# Altium PCB PCB_RTM_SATA.PcbDoc
Units mil, origin at the board's own origin, x right, y up, seen from the top; angles counter-clockwise.
Board outline 2168.33 x 5849.53 mil, 4 copper layers (Top Layer, MidPlane_1, MidPlane_2, Bottom Layer), stack 61.899 mil thick; 27 components, 80 nets, 348 pads, 92 vias.
Unrouted connection lines stored in the file: 3.
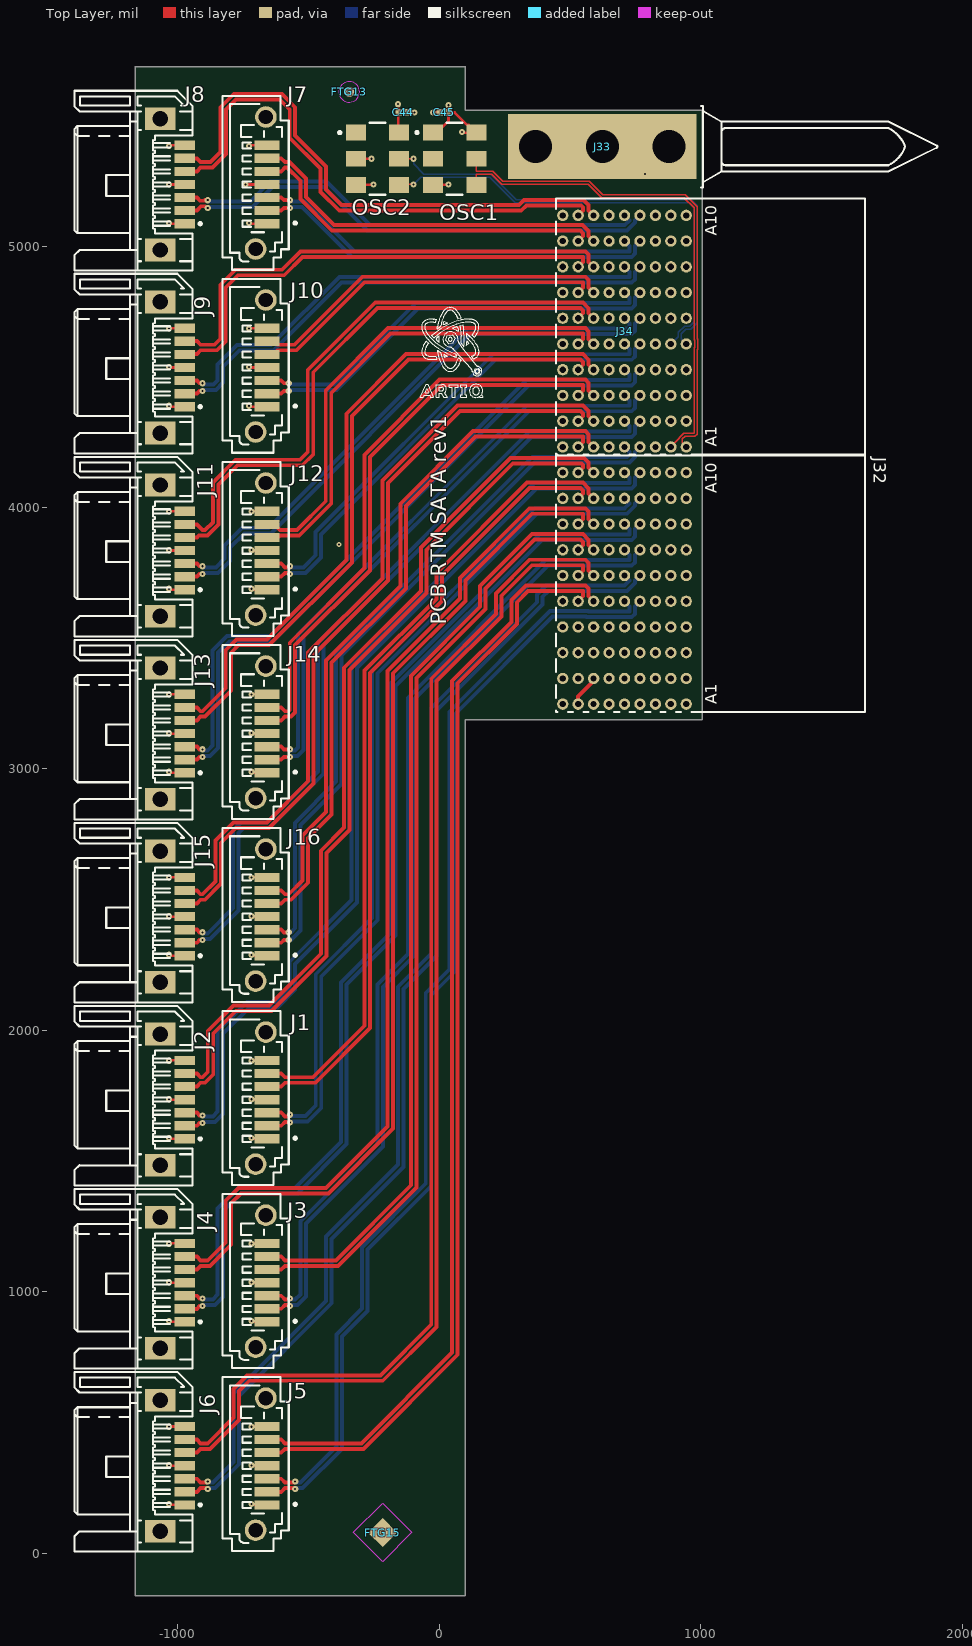
[diagram p0: Top Layer view]
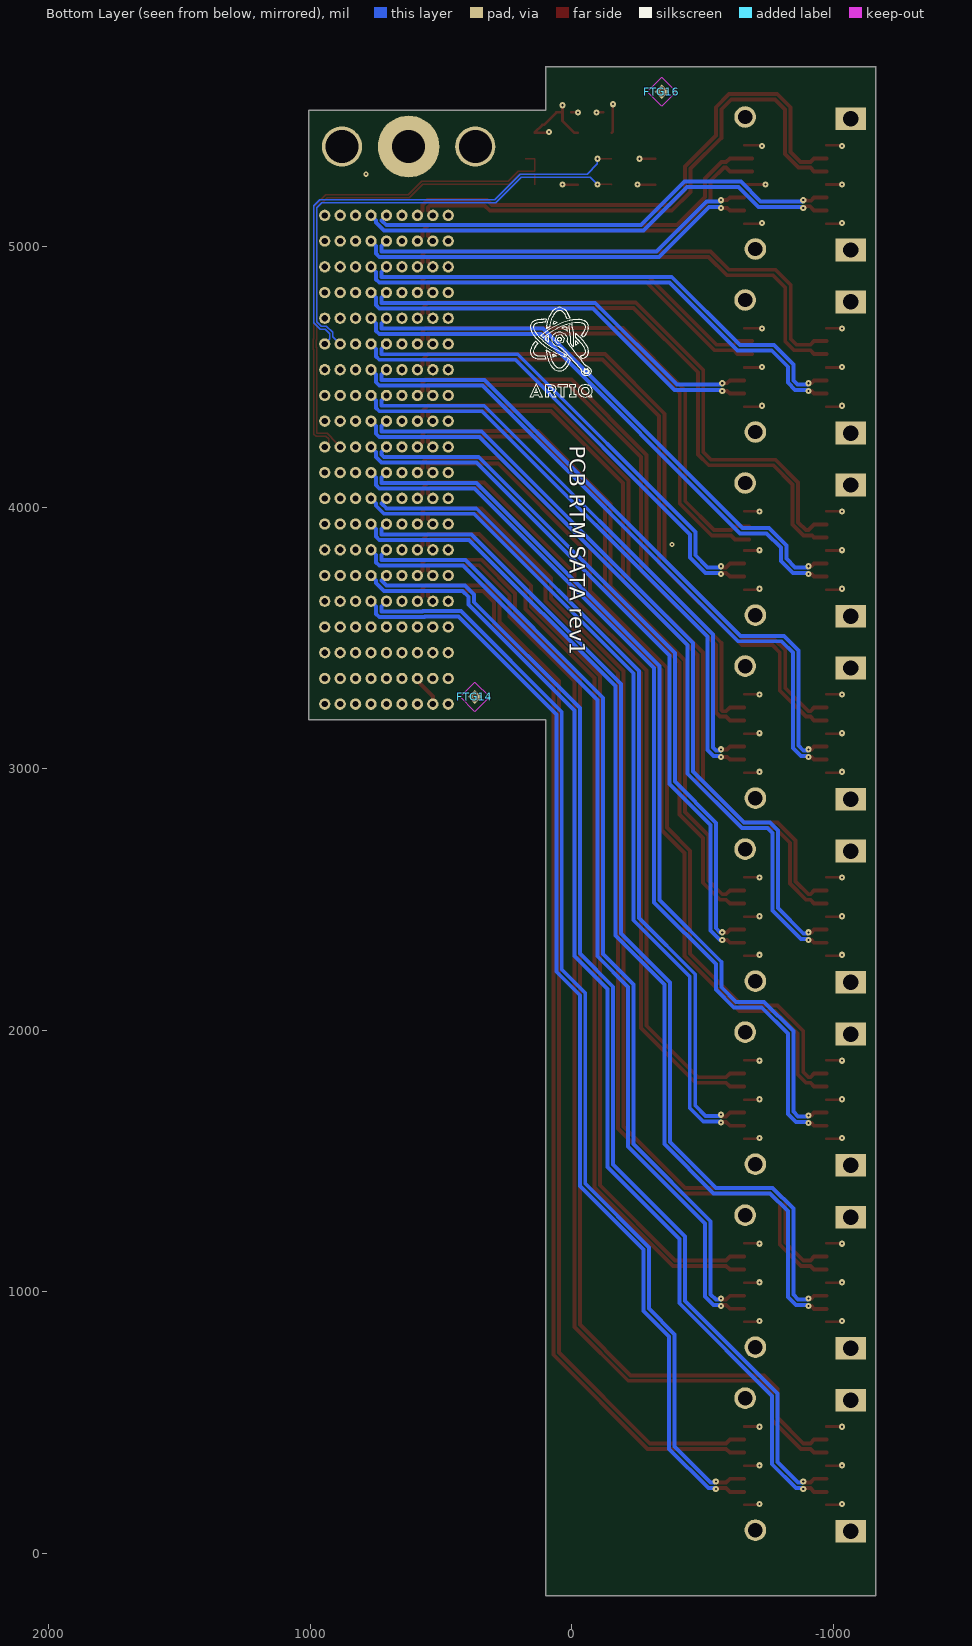
[diagram p1: Bottom Layer view, seen from below]
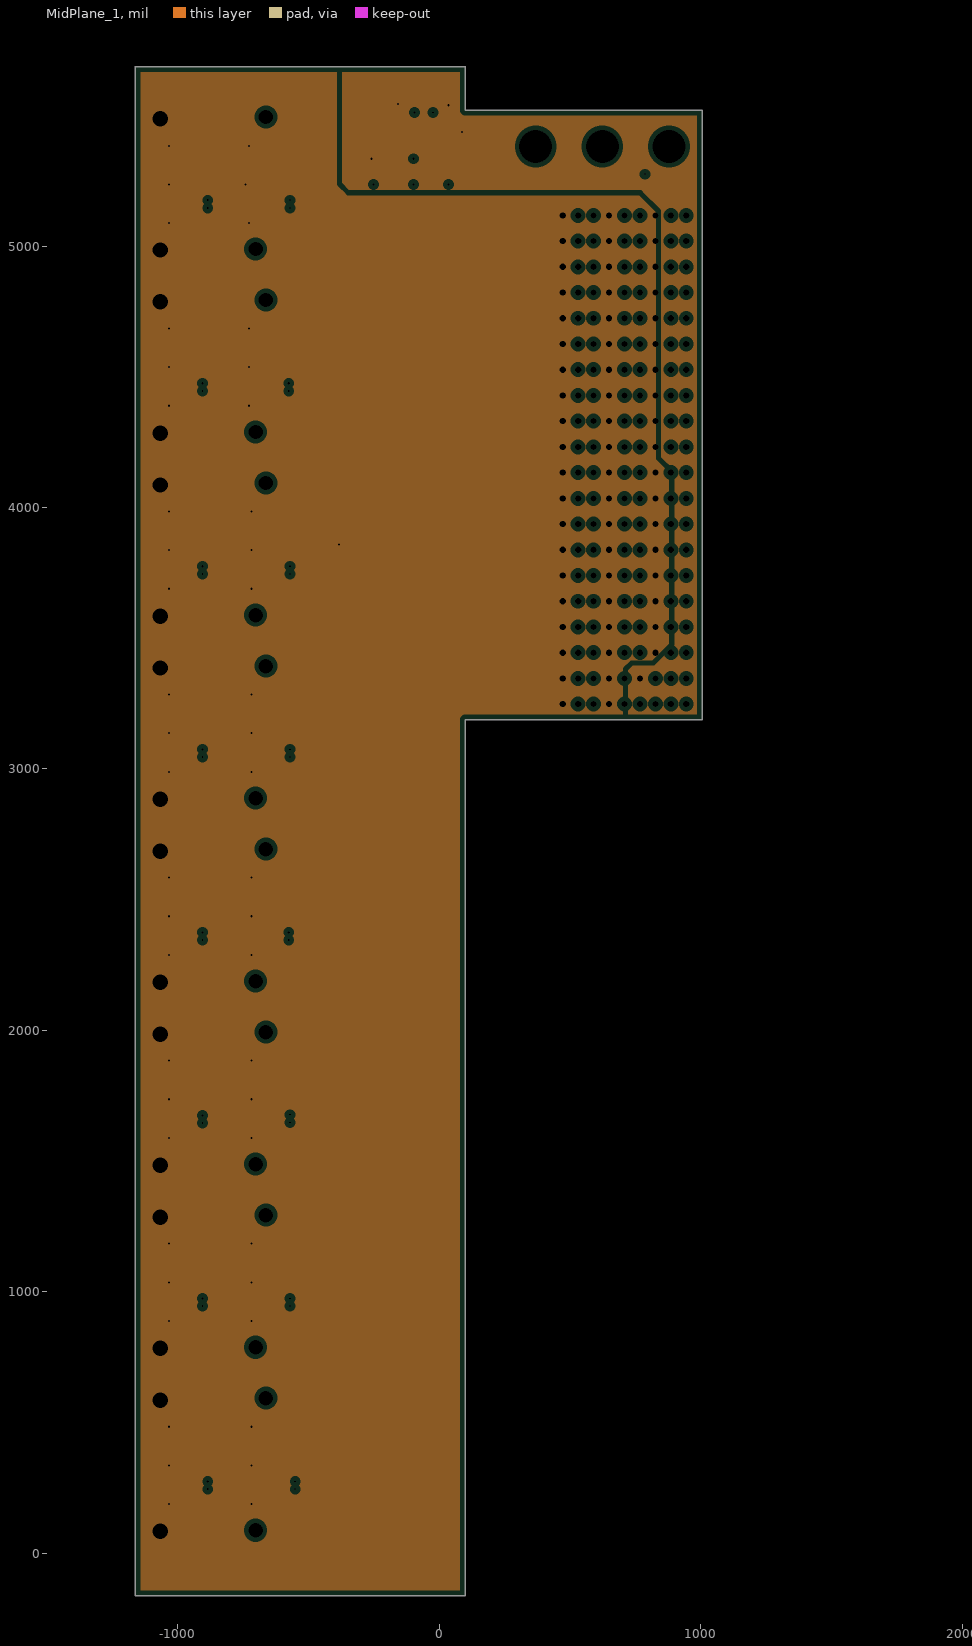
[diagram p2: MidPlane_1, clearances drawn from the general rule]
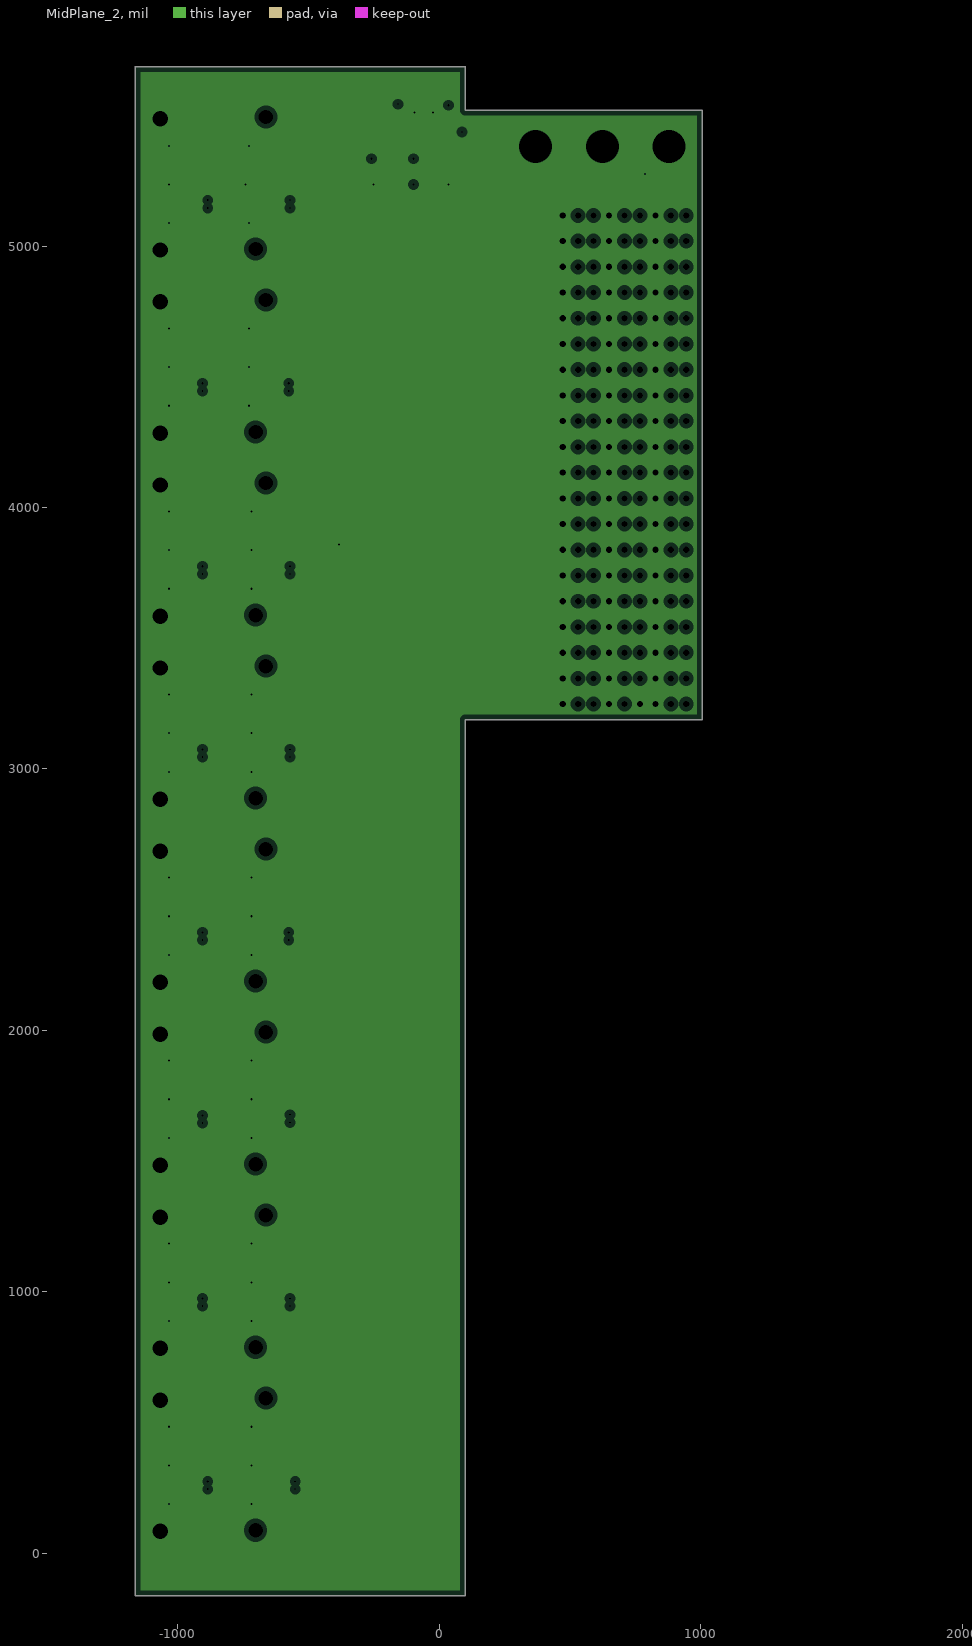
[diagram p3: MidPlane_2, clearances drawn from the general rule]
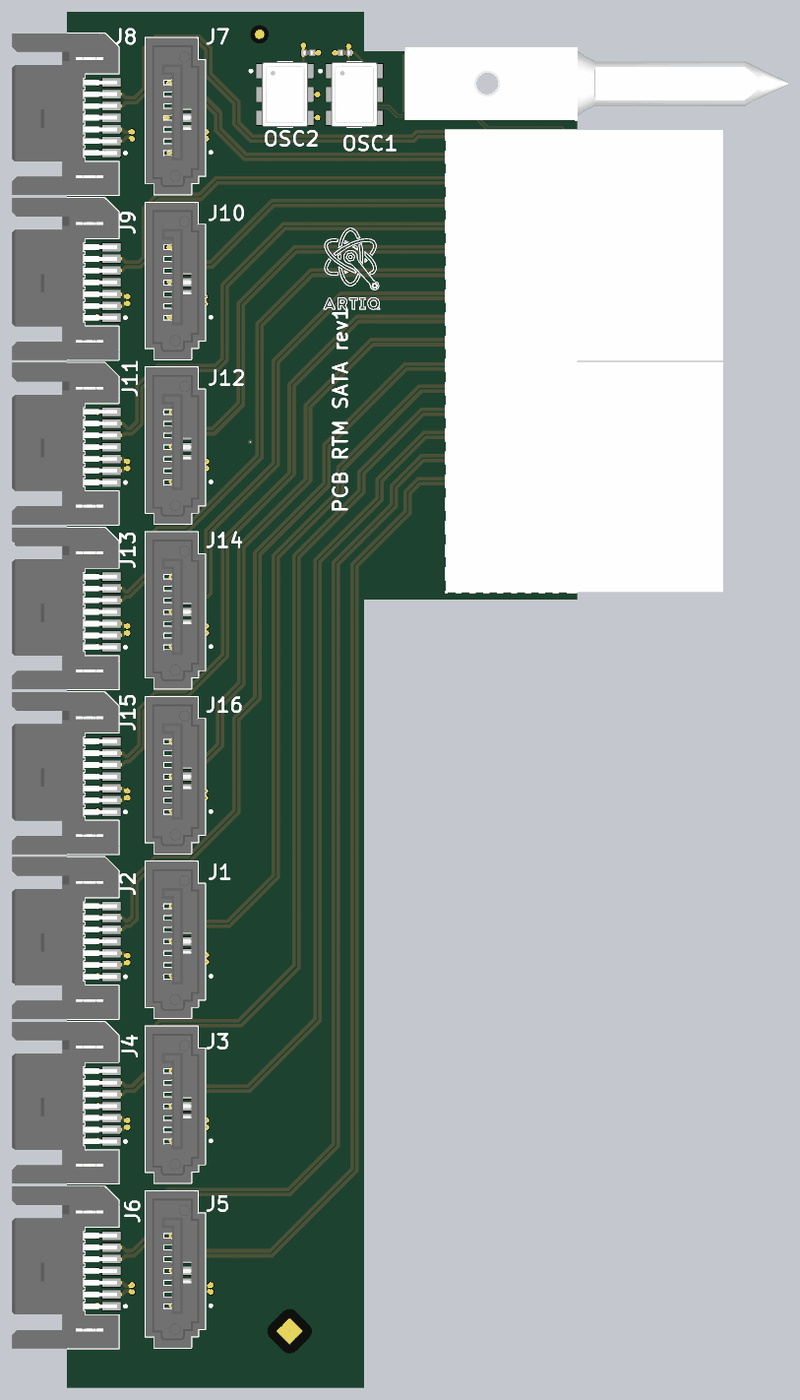
[diagram p4: 3D render of the assembled board from above, using the file's embedded part models]

## Layer stack, top to bottom
Top Solder: solder mask 0.4, Solder Resist, Dk 3.5
Top Layer: signal copper 1.4
Dielectric1: prepreg 14.1732, FR-4, Dk 4.8
MidPlane_1: plane copper 1.4, net GND
Dielectric3: core 27.9528, FR-4, Dk 4.8
MidPlane_2: plane copper 1.4, net GND
Dielectric2: prepreg 14.1732, FR-4, Dk 4.8
Bottom Layer: signal copper 1.4
Bottom Solder: solder mask 0.4, Solder Resist, Dk 3.5

## Board outline
-1161.42,-162.48 98.38,-162.48 ccw(c98.38,-160.97) 99.9,-160.97 99.9,3187.92 1003.88,3187.92 ccw(c1003.88,3189.43) 1005.4,3189.43 1005.4,5518.13 ccw(c1003.88,5518.13) 1003.88,5519.65 ccw(c1003.88,5518.13) 1003.85,5519.65 1003.88,5519.65 99.9,5519.65 99.9,5685.53 cw(c98.38,5685.53) 99.9,5685.53 ccw(c98.38,5685.53) 98.38,5687.05 ccw(c98.38,5685.53) 98.35,5687.05 -1161.42,5687.05 ccw(c-1161.42,5685.53) -1162.93,5685.53 -1162.93,-160.97 ccw(c-1161.42,-160.97)

## Design rules (kind name [scope] priority, off if disabled: settings)
Clearance Clearance_KO [OnLayer('Keep-Out Layer')] p1: gap=10
Clearance Clearance_Poly_DS [(InDifferentialPairClass('All Differential Pairs')) vs InPolygon] p2: gap=40
Clearance Clearance_Poly [InPolygon] p3: gap=11.81
Clearance Clearance_DS&CLK [(InNet('SFP_CLK*') OR InNet('FPGA_CLK*'))] p4: gap=6
Clearance Clearance_DS&RTM [WithinRoom('U_RTM_Connectors')] p5: gap=6
Clearance Clearance_DS [All] p6: gap=8
Clearance [All] p7: gap=6 except(15: Arc-Poly Track-Poly SMDPad-Poly THPad-Poly Via-Poly Fill-Poly Poly-Poly)
DiffPairsRouting [All] p1 off: maxlimit=6 minlimit=6 mostfreqgap=6 toplayer_minwidth=15 toplayer_maxwidth=15 toplayer_prefwidth=15 bottomlayer_minwidth=15 bottomlayer_maxwidth=15 bottomlayer_prefwidth=15 maxuncoupledlength=500
HoleSize [All] p1: absolutevalues=TRUE maxlimit=472.44 minlimit=1 maxpercent=80.000 minpercent=20.000
MinimumSolderMaskSliver [All] p1: minsoldermaskwidth=0
PlaneClearance [All] p1: clearance=16.73
PlaneConnect PlaneConnect_Via [IsVia] p1: planeconnectstyle=Direct reliefexpansion=20 reliefentries=4 reliefconductorwidth=10 reliefairgap=10
PlaneConnect [All] p2: planeconnectstyle=Relief reliefexpansion=10 reliefentries=4 reliefconductorwidth=10 reliefairgap=10
PolygonConnect PolygonConnect_Via [IsVia] p1: connectstyle=Direct reliefconductorwidth=10 reliefentries=4 polygonreliefangle="90 Angle" airgapwidth=10
PolygonConnect [All] p2: connectstyle=Relief reliefconductorwidth=10 reliefentries=4 polygonreliefangle="90 Angle" airgapwidth=10
RoomDefinition PCB_RTM_SATA [InComponentClass('PCB_RTM_SATA')] p1: confinementstyle=ConfineIn formatcopy=TRUE lockcomponents=FALSE outline -6375.21,3085.88 -4059.86,3085.88 -4059.86,3726.04 -6375.21,3726.04
RoutingVias [All] p1: holewidth=7.87 width=23.62 viastyle="Through Hole" minholewidth=7.87 minwidth=23.62 maxholewidth=23.62 maxwidth=47.24
SilkToSilkClearance [All] p1: silktosilkclearance=6
SilkToSolderMaskClearance SilkscreenOverComponentPads [IsPad] p1: minsilkscreentomaskgap=0 clearancetoexposedcopper=TRUE
SolderMaskExpansion [All] p1: expansion=4
Width Width_DS [(InDifferentialPairClass('All Differential Pairs'))] p1: maxlimit=12 minlimit=6 preferedwidth=12
Width [All] p2: maxlimit=23.54 minlimit=6 preferedwidth=23.54 minimp=50.000000 maximp=50.000000 favimp=50.000000
23 further rules are at their usual default settings.

## Classes and differential pairs
differential pair GTP10TX: +GTP10TX_P -GTP10TX_N
differential pair GTP9TX: +GTP9TX_P -GTP9TX_N
differential pair GTP8TX: +GTP8TX_P -GTP8TX_N
differential pair GTP7TX: +GTP7TX_P -GTP7TX_N
differential pair GTP6TX: +GTP6TX_P -GTP6TX_N
differential pair GTP5TX: +GTP5TX_P -GTP5TX_N
differential pair GTP4TX: +GTP4TX_P -GTP4TX_N
differential pair GTP3TX: +GTP3TX_P -GTP3TX_N
differential pair GTP2TX: +GTP2TX_P -GTP2TX_N
differential pair GTP1TX: +GTP1TX_P -GTP1TX_N
differential pair GTP16TX: +GTP16TX_P -GTP16TX_N
differential pair GTP16RX: +GTP16RX_P -GTP16RX_N
differential pair GTP15TX: +GTP15TX_P -GTP15TX_N
differential pair GTP15RX: +GTP15RX_P -GTP15RX_N
differential pair GTP14TX: +GTP14TX_P -GTP14TX_N
differential pair GTP14RX: +GTP14RX_P -GTP14RX_N
differential pair GTP13TX: +GTP13TX_P -GTP13TX_N
differential pair GTP13RX: +GTP13RX_P -GTP13RX_N
differential pair GTP12TX: +GTP12TX_P -GTP12TX_N
differential pair GTP12RX: +GTP12RX_P -GTP12RX_N
differential pair GTP11TX: +GTP11TX_P -GTP11TX_N
differential pair GTP11RX: +GTP11RX_P -GTP11RX_N
differential pair GTP10RX: +GTP10RX_P -GTP10RX_N
differential pair GTP9RX: +GTP9RX_P -GTP9RX_N
differential pair GTP8RX: +GTP8RX_P -GTP8RX_N
differential pair GTP7RX: +GTP7RX_P -GTP7RX_N
differential pair GTP6RX: +GTP6RX_P -GTP6RX_N
differential pair GTP5RX: +GTP5RX_P -GTP5RX_N
differential pair GTP4RX: +GTP4RX_P -GTP4RX_N
differential pair GTP3RX: +GTP3RX_P -GTP3RX_N
differential pair GTP2RX: +GTP2RX_P -GTP2RX_N
differential pair GTP1RX: +GTP1RX_P -GTP1RX_N
differential pair CLK1: +CLK1_P -CLK1_N
differential pair CLK2: +CLK2_P -CLK2_N

## Components (designator, comment, footprint, x,y, rotation, side; value= is the part's Value field where it differs from the comment)
C44 "100nF" CAPC1005X55N -137.8,5511.81 r180 top
C45 "100nF" CAPC1005X55N 19.68,5511.81 r0 top
FTG13 "Use only in PCB" FIDUCIAL_TOP_C100-200 -344.49,5590.55 r90 top
FTG14 "Use only in PCB" FIDUCIAL_TOP_S100-200 370.08,3275.59 r90 bottom
FTG15 "Use only in PCB" FIDUCIAL_TOP_S200-400 -216.54,78.74 r0 top
FTG16 "Use only in PCB" FIDUCIAL_TOP_S100-200 -344.49,5590.55 r90 bottom
J1 "SATA" MOLEX_67800-5005 -659.45,1735.1 r90 top
J2 "SATA" 3M_5607-4200-SH -974.41,1735.1 r270 top
J3 "SATA" MOLEX_67800-5005 -659.45,1034.87 r90 top
J4 "SATA" 3M_5607-4200-SH -974.41,1034.87 r270 top
J5 "SATA" MOLEX_67800-5005 -659.45,334.65 r90 top
J6 "SATA" 3M_5607-4200-SH -974.41,334.65 r270 top
J7 "SATA" MOLEX_67800-5005 -659.45,5236.22 r90 top
J8 "SATA" 3M_5607-4200-SH -974.41,5236.22 r270 top
J9 "SATA" 3M_5607-4200-SH -974.41,4536 r270 top
J10 "SATA" MOLEX_67800-5005 -659.45,4536 r90 top
J11 "SATA" 3M_5607-4200-SH -974.41,3835.77 r270 top
J12 "SATA" MOLEX_67800-5005 -659.45,3835.77 r90 top
J13 "SATA" 3M_5607-4200-SH -974.41,3135.55 r270 top
J14 "SATA" MOLEX_67800-5005 -659.45,3135.55 r90 top
J15 "SATA" 3M_5607-4200-SH -974.41,2435.32 r270 top
J16 "SATA" MOLEX_67800-5005 -659.45,2435.32 r90 top
J32 "Family" TYCO_6469183-1 708.66,3690.95 r0 top locked
J33 "Family" TYCO_1469265-1 624,5381.35 r0 top
J34 "Family" TYCO_6469183-1 708.66,4675.2 r0 top locked
OSC1 "125MHz" OSC_SILICON-LAB_SI531 59.06,5334.65 r0 top
OSC2 "156.25MHz" OSC_SILICON-LAB_SI530 -236.22,5334.65 r0 top

## Footprints (in the part's own frame and the unit in brackets; to place one, negate y for a bottom-side part, rotate by r counter-clockwise, add the part's x,y. Pads: shape width x height; smd on the part's side, far side on the other; paste and mask are expansions set on the pad)
3M_5607-4200-SH [mm] "1.27mm (.050\") Pitch, Surface Mount, Right Angle, Serial ATA Plug (SATA)"
  rect 0.9x2 smd: 1(3.81,0) 2(2.54,0) 3(1.27,0) 4(0,0) 5(-1.27,0) 6(-2.54,0) 7(-3.81,0)
  rect 2.2x3 hole 1.5: 8(-6.37,-2.36) 8(6.37,-2.36)
  silkscreen extent -9.11,-10.71 8.36,1.64, body extent -9.11,-10.71 8.36,0.79, height 4
CAPC1005X55N [mm] "Chip Capacitor, Body 1.0x0.55mm, IPC Medium Density"
  rect 0.62x0.62 smd: 1(-0.45,0) 2(0.45,0)
  body extent -0.52,-0.27 0.53,0.28, height 0.55
FIDUCIAL_TOP_C100-200 [mm] "Round Fiducial Target, Top Layer, 1.0mm, Top Solder 2.0mm, Keepout =2.0mm"
  round 1 smd paste-0.51 mask+0.5: FTG2(0,0)
  Top Layer keep-out circle w0.1: c0,0 r1
FIDUCIAL_TOP_S100-200 [mm] "Square Fiducial Target, Top Layer, 1.0mm, Top Solder 2.0mm, Keepout =2.0mm"
  rect 1x1 smd rot 45 paste-0.51 mask+0.5: 1(0,0)
  Top Layer keep-out region: 1.414,0 0,-1.414 -1.414,0 0,1.414
FIDUCIAL_TOP_S200-400 [mm] "Square Fiducial Target, Top Layer, 2.0mm, Top Solder 4.0mm, Keepout =4.0mm"
  rect 2x2 smd rot 45 paste-0.9 mask+1: 1(0,0)
  Top Layer keep-out region: -2.839,0.011 -0.011,2.839 2.818,0.011 -0.011,-2.818
MOLEX_67800-5005 [mm] "1.27mm Pitch, 7 Contacts, Serial ATA High Speed Header, Straight with Locking Latch"
  rect 0.9x2.4 smd: 1(-3.81,0) 2(-2.54,0) 3(-1.27,0) 4(0,0) 5(1.27,0) 6(2.54,0) 7(3.81,0)
  round 2.1 hole 1.4: MECH1(-6.27,1.1) MECH2(6.56,0.1)
  silkscreen extent -8.28,-2.88 8.61,4.33, body extent -8.29,-2.13 8.62,4.32, height 8.4
OSC_SILICON-LAB_SI530 [mm] "Oscillator Si530 Series, 6 pins, 5x7mm"
  rect 1.95x1.55 smd: 1(-2.1,2.54) 2(-2.1,0) 3(-2.1,-2.54) 4(2.1,-2.54) 5(2.1,0) 6(2.1,2.54)
  silkscreen extent -3.8,-3.5 0.77,3.5, body extent -2.5,-3.5 2.5,3.5, height 1.8
OSC_SILICON-LAB_SI531 [mm] "Oscillator Si531 Series, 6 pins, 5x7mm"
  rect 1.95x1.55 smd: 1(-2.1,2.54) 2(-2.1,0) 3(-2.1,-2.54) 4(2.1,-2.54) 5(2.1,0) 6(2.1,2.54)
  silkscreen extent -3.8,-3.5 0.77,3.5, body extent -2.5,-3.5 2.5,3.5, height 1.8
TYCO_1469265-1 [mm] "Universal Right Angle Male Power Module Guide (keyed)"
  round 3.9 hole 3.2: 1(-6.48,0) 1(6.48,0)
  rect 18.3x6.3 smd paste-4.15 mask-4.15: 1(0,0)
  round 6 hole 3.2: 1(0,0)
  silkscreen extent 9.58,-3.96 32.55,3.94, body extent -8.92,-3.95 32.53,3.95, height 9.7
TYCO_6469183-1 [mm] "60 Positions, Pitch 2.5mm,  Advanced TCA, Z-PACK HM-Zd BackPlane Press Fit Header"
  round 1.1 hole 0.6: A1(6,-11.25) A2(6,-8.75) A3(6,-6.25) A4(6,-3.75) A5(6,-1.25) A6(6,1.25) A7(6,3.75) A8(6,6.25) A9(6,8.75) A10(6,11.25) B1(4.5,-11.25) B2(4.5,-8.75) B3(4.5,-6.25) B4(4.5,-3.75) B5(4.5,-1.25) B6(4.5,1.25) B7(4.5,3.75) B8(4.5,6.25) B9(4.5,8.75) B10(4.5,11.25) BG1(3,-11.25) BG2(3,-8.75) BG3(3,-6.25) BG4(3,-3.75) BG5(3,-1.25) BG6(3,1.25) BG7(3,3.75) BG8(3,6.25) BG9(3,8.75) BG10(3,11.25) C1(1.5,-11.25) C2(1.5,-8.75) C3(1.5,-6.25) C4(1.5,-3.75) C5(1.5,-1.25) C6(1.5,1.25) C7(1.5,3.75) C8(1.5,6.25) C9(1.5,8.75) C10(1.5,11.25) D1(0,-11.25) D2(0,-8.75) D3(0,-6.25) D4(0,-3.75) D5(0,-1.25) D6(0,1.25) D7(0,3.75) D8(0,6.25) D9(0,8.75) D10(0,11.25) DG1(-1.5,-11.25) DG2(-1.5,-8.75) DG3(-1.5,-6.25) DG4(-1.5,-3.75) DG5(-1.5,-1.25) DG6(-1.5,1.25) DG7(-1.5,3.75) DG8(-1.5,6.25) DG9(-1.5,8.75) DG10(-1.5,11.25) E1(-3,-11.25) E2(-3,-8.75) E3(-3,-6.25) E4(-3,-3.75) E5(-3,-1.25) E6(-3,1.25) E7(-3,3.75) E8(-3,6.25) E9(-3,8.75) E10(-3,11.25) F1(-4.5,-11.25) F2(-4.5,-8.75) F3(-4.5,-6.25) F4(-4.5,-3.75) F5(-4.5,-1.25) F6(-4.5,1.25) F7(-4.5,3.75) F8(-4.5,6.25) F9(-4.5,8.75) F10(-4.5,11.25) FG1(-6,-11.25) FG2(-6,-8.75) FG3(-6,-6.25) FG4(-6,-3.75) FG5(-6,-1.25) FG6(-6,1.25) FG7(-6,3.75) FG8(-6,6.25) FG9(-6,8.75) FG10(-6,11.25)
  silkscreen extent -6.65,-12 23.35,12.9, body extent -6.65,-12 23.35,12.9, height 13.31

## Part data
C44 C45: library part CC0402_100NF_16V_10%_X7R, "Non-polarised capacitor"
FTG13: library part FIDUCIAL_TARGET_C100-200, "Fiducial Target"
FTG14 FTG16: library part FIDUCIAL_TARGET_S100-200, "Fiducial Target"
FTG15: library part FIDUCIAL_TARGET_S200-400, "Fiducial Target"
J1 J3 J5 J7 J10 J12 J14 J16: library part MOLEX_67800-5005, "7 Pin SATA Receptacle"
J2 J4 J6 J8 J9 J11 J13 J15: library part 3M_5607-4200-SH, "7 Pin + 1 Shield SATA Receptacle"
J32 J34: library part TYCO_6469183-1, "Connector 60 ATCA Male 30 Pairs (60 Signals) + 3x10 Ground"
J33: library part TYCO_1469265-1, "Single Pin Male"
OSC1: library part OSC_125MHZ_SILICON-LAB_531BC125M000DG, "10-1400MHz, Crystal Oscillator (XO), Si531 Series"
OSC2: library part OSC_156.25MHZ_SILICON-LAB_530BC156M250DG, "10-1400MHz, Crystal Oscillator (XO), Si530 Series"

## Via types
v1: diameter 23.62, hole 7.87, Top Layer to Bottom Layer, 90 vias
v2: diameter 19.68, hole 7.87, Top Layer to Bottom Layer, tented both sides, 2 vias

## Nets (pads, with @x,y where several pads share a name; then routed paths per layer and width w, separated by ;. In a path a pad name is that pad's centre, name@x,y a point inside that pad or via, vN(x,y) a via of type N, cw(c..) or ccw(c..) an arc to the next point about the centre after c; other vN are vias at no path point)
CLK1_N: J34.A1 OSC1.5 | length 1956
  Top Layer w5: OSC1.5@177.17,5334.65 OSC1.5 141.73,5287.4 204.72,5287.4 243.29,5248.84 573.8,5248.84 625.79,5196.85 940.94,5196.85 986.04,5151.76 986.04,4645.86 988.04,4643.86 988.04,4606.3 986.04,4604.3 986.04,4281.5 978.15,4273.62 940.41,4273.62 929.75,4262.97 929.75,4247.41 J34.A1
CLK1_P: J34.B1 OSC1.4 | length 1903
  Top Layer w5: OSC1.4 141.73,5275.59 200.98,5275.59 238.73,5237.84 569.25,5237.84 621.24,5185.85 936.2,5185.85 975.04,5147.01 975.04,4641.3 977.04,4639.3 977.04,4612.67 975.04,4610.67 975.04,4286.06 973.6,4284.62 935.85,4284.62 918.75,4267.52 918.75,4265.21 J34.B1
CLK2_N: J34.A5 OSC2.5 | length 1799.3
  Top Layer w5: OSC2.5 v1(-98.43,5334.65)
  Bottom Layer w5: v1(-98.43,5334.65) -98.43,5314.96 -59.06,5275.59 196.85,5275.59 295.28,5177.17 964.57,5177.17 986.04,5155.7 986.04,4707.36 961.93,4683.26 943.1,4683.26 925.2,4665.35 925.2,4645.67 J34.A5
CLK2_P: J34.B5 OSC2.4 | length 1758.7
  Top Layer w5: OSC2.4 -151.97,5236.22 v1(-98.43,5236.22)
  Bottom Layer w5: v1(-98.43,5236.22) -70.06,5264.59 192.29,5264.59 290.72,5166.17 955.88,5166.17 975.04,5147.01 975.04,4711.92 965.15,4702.03 957.37,4694.26 938.54,4694.26 914.2,4669.91 914.2,4654.35 J34.B5
GND: C44.1 C45.1 J1.1 J1.4 J1.7 J2.1 J2.4 J2.7 J2.8 J3.1 J3.4 J3.7 J4.1 J4.4 J4.7 J4.8 J5.1 J5.4 J5.7 J6.1 J6.4 J6.7 J6.8 J7.1 J7.4 J7.7 J8.1 J8.4 J8.7 J8.8 J9.1 J9.4 J9.7 J9.8 J10.1 J10.4 J10.7 J11.1 J11.4 J11.7 J11.8 J12.1 J12.4 J12.7 J13.1 J13.4 J13.7 J13.8 J14.1 J14.4 J14.7 J15.1 J15.4 J15.7 J15.8 J16.1 J16.4 J16.7 J32.BG1 J32.BG2 J32.BG3 J32.BG4 J32.BG5 J32.BG6 J32.BG7 J32.BG8 J32.BG9 J32.BG10 J32.C1 J32.DG1 J32.DG2 J32.DG3 J32.DG4 J32.DG5 J32.DG6 J32.DG7 J32.DG8 J32.DG9 J32.DG10 J32.FG1 J32.FG2 J32.FG3 J32.FG4 J32.FG5 J32.FG6 J32.FG7 J32.FG8 J32.FG9 J32.FG10 J33.1 J34.BG1 J34.BG2 J34.BG3 J34.BG4 J34.BG5 J34.BG6 J34.BG7 J34.BG8 J34.BG9 J34.BG10 J34.DG1 J34.DG2 J34.DG3 J34.DG4 J34.DG5 J34.DG6 J34.DG7 J34.DG8 J34.DG9 J34.DG10 J34.FG1 J34.FG2 J34.FG3 J34.FG4 J34.FG5 J34.FG6 J34.FG7 J34.FG8 J34.FG9 J34.FG10 OSC1.3 OSC2.3 | length 3124.8
  Top Layer w10: v1(-1033.46,188.41) -1029.7,184.65 J6.1 ; v1(-1033.46,336.05) -1032.06,334.65 J6.4 ; v1(-1033.46,483.69) -1032.51,484.65 J6.7 ; v1(-1033.46,888.64) -1029.7,884.87 J4.1 ; v1(-1033.46,1036.28) -1032.06,1034.87 J4.4 ; v1(-1033.46,1183.91) -1032.51,1184.87 J4.7 ; v1(-1033.46,1588.86) -1029.7,1585.1 J2.1 ; v1(-1033.46,1736.5) -1032.06,1735.1 J2.4 ; v1(-1033.46,1884.14) -1032.51,1885.1 J2.7 ; v1(-1033.46,2289.09) -1029.7,2285.32 J15.1 ; v1(-1033.46,2436.73) -1032.06,2435.32 J15.4 ; v1(-1033.46,2584.36) -1032.51,2585.32 J15.7 ; v1(-1033.46,2989.31) -1029.7,2985.55 J13.1 ; v1(-1033.46,3136.95) -1032.06,3135.55 J13.4 ; v1(-1033.46,3284.59) -1032.51,3285.55 J13.7 ; v1(-1033.46,3689.54) -1029.7,3685.77 J11.1 ; v1(-1033.46,3837.18) -1032.06,3835.77 J11.4 ; v1(-1033.46,3984.81) -1032.51,3985.77 J11.7 ; v1(-1033.46,4389.76) -1029.7,4385.99 J9.1 ; v1(-1033.46,4537.4) -1032.06,4536 J9.4 ; v1(-1033.46,4685.04) -1032.51,4686 J9.7 ; v1(-1033.46,5088.58) -1031.1,5086.22 J8.1 ; v1(-1033.46,5236.22) J8.4 ; v1(-1033.46,5383.86) -1031.1,5386.22 J8.7 ; v1(-741.54,5236.22) J7.4 ; v1(-728.35,4389.76) -724.58,4386 J10.1 ; v1(-728.35,4537.4) -726.94,4536 J10.4 ; v1(-728.35,4685.04) -727.39,4686 J10.7 ; v1(-728.35,5088.58) -725.98,5086.22 J7.1 ; v1(-728.35,5383.86) -725.98,5386.22 J7.7 ; v1(-718.5,188.41) -714.74,184.65 J5.1 ; v1(-718.5,336.05) -717.1,334.65 J5.4 ; v1(-718.5,483.69) -717.55,484.65 J5.7 ; v1(-718.5,888.64) -714.74,884.87 J3.1 ; v1(-718.5,1036.28) -717.1,1034.87 J3.4 ; v1(-718.5,1183.91) -717.55,1184.87 J3.7 ; v1(-718.5,1588.86) -714.73,1585.1 J1.1 ; v1(-718.5,1736.5) -717.1,1735.1 J1.4 ; v1(-718.5,1884.14) -717.55,1885.1 J1.7 ; v1(-718.5,2289.09) -714.73,2285.32 J16.1 ; v1(-718.5,2436.73) -717.1,2435.32 J16.4 ; v1(-718.5,2584.36) -717.55,2585.32 J16.7 ; v1(-718.5,2989.31) -714.73,2985.55 J14.1 ; v1(-718.5,3136.95) -717.1,3135.55 J14.4 ; v1(-718.5,3284.59) -717.55,3285.55 J14.7 ; v1(-718.5,3689.54) -714.73,3685.77 J12.1 ; v1(-718.5,3837.18) -717.1,3835.77 J12.4 ; v1(-718.5,3984.81) -717.55,3985.77 J12.7 ; OSC2.3 -253.54,5234.65 v1(-251.97,5236.22) ; C44.1 v1(-94.49,5511.81) ; OSC1.3 33.86,5234.65 v1(35.43,5236.22) ; v1(-23.62,5511.81) C45.1
  other v2: -383.86,3858.27 787.4,5275.59
GTP1RX_N: J8.3 J34.D10 | length 1816.8
  Top Layer w15: J8.3 -927.54,5186.22 -915.19,5173.88 v1@-895.67,5173.88 ; v1@-895.67,5176.03 v1(-885.83,5176.03)
  Bottom Layer w15: v1(-885.83,5176.03) -881.52,5171.72 -722.59,5171.72 -646.93,5247.38 -432.13,5247.38 -265.75,5081 516.06,5081 ; 727.69,5099.08 709.61,5081 605.98,5081 605.94,5080.96 575.16,5080.96 575.12,5081 546.93,5081 546.89,5080.96 516.11,5080.96 ; 516.06,5081 516.11,5080.96
GTP1RX_P: J8.2 J34.C10 | length 1870.5
  Top Layer w15: J8.2 -927.54,5136.22 -910.88,5152.88 v1@-895.67,5152.88
  Bottom Layer w15: v1(-885.83,5146.41) -881.52,5150.72 -713.89,5150.72 -638.24,5226.38 -440.82,5226.38 -274.45,5060 507.36,5060 507.41,5059.96 555.58,5059.96 555.63,5060 566.42,5060 566.46,5059.96 614.64,5059.96 614.68,5060 718.3,5060 748.69,5090.38 748.69,5099.08 J34.C10
GTP1TX_N: J8.5 J34.F10 | length 2079.7
  Top Layer w15: J8.5 -927.54,5286.22 -913.04,5300.72 -867.29,5300.72 -815.61,5352.39 -815.61,5522.97 -777.56,5561.02 -610.24,5561.02 -572.18,5522.97 -572.18,5414.7 -454.07,5296.59 -454.07,5207.84 -382.71,5136.48 313.65,5136.48 333.33,5156.17 522.8,5156.17 543.14,5156.17 550.52,5148.78 550.52,5137.14 J34.F10
GTP1TX_P: J8.6 J34.E10 | length 2114.5
  Top Layer w15: J8.6 -927.54,5336.22 -913.04,5321.72 -875.98,5321.72 -836.61,5361.09 -836.61,5531.67 -786.26,5582.02 -601.54,5582.02 -551.18,5531.67 -551.18,5423.4 -433.07,5305.29 -433.07,5216.54 -374.02,5157.48 304.95,5157.48 324.63,5177.17 551.84,5177.17 571.52,5157.48 571.52,5137.14 J34.E10
GTP2RX_N: J7.3 J34.D9 | length 1519.7
  Top Layer w15: J7.3 -604.7,5186.22 -594.52,5176.03 v1(-570.87,5176.03)
  Bottom Layer w15: v1(-570.87,5176.03) -566.56,5171.72 -516.21,5171.72 -324.8,4980.32 727.69,4980.32 727.69,5000.66 J34.D9
GTP2RX_P: J7.2 J34.C9 | length 1554.5
  Top Layer w15: J7.2 -604.7,5136.22 -594.52,5146.41 v1(-570.87,5146.41)
  Bottom Layer w15: v1(-570.87,5146.41) -566.56,5150.72 -524.91,5150.72 -333.5,4959.32 736.39,4959.32 748.69,4971.62 748.69,5000.66 J34.C9
GTP2TX_N: J7.5 J34.F9 | length 1428.3
  Top Layer w15: J7.5@-688.98,5286.22 J7.5 -604.7,5286.22 -590.2,5300.72 -581.85,5300.72 -531.5,5250.36 -531.5,5180.08 -411.42,5060 507.36,5060 507.41,5059.96 539.78,5059.96 550.52,5049.21 550.52,5038.71 J34.F9
GTP2TX_P: J7.6 J34.E9 | length 1463.3
  Top Layer w15: J7.6@-688.98,5336.22 J7.6 -604.7,5336.22 -604.7,5335.87 -590.55,5321.72 -573.15,5321.72 -510.5,5259.06 -510.5,5188.78 -402.72,5081 516.06,5081 ; J34.E9 571.52,5038.71 571.52,5057.91 548.43,5081 546.93,5081 546.89,5080.96 516.11,5080.96 ; 516.06,5081 516.11,5080.96
GTP3RX_N: J9.3 J34.D8 | length 1960.8
  Top Layer w15: J9.3 -927.54,4486 -917.35,4475.81 v1(-905.51,4475.81)
  Bottom Layer w15: v1(-905.51,4475.81) -901.2,4471.5 -863.15,4471.5 -847.77,4486.87 -847.77,4547.46 -773.93,4621.3 -643.09,4621.3 -382.5,4881.89 727.69,4881.89 727.69,4902.23 J34.D8
GTP3RX_P: J9.2 J34.C8 | length 1995.6
  Top Layer w15: J9.2 -927.54,4435.99 -917.35,4446.18 v1(-905.51,4446.18)
  Bottom Layer w15: v1(-905.51,4446.18) -901.2,4450.5 -854.45,4450.5 -826.77,4478.18 -826.77,4538.76 -765.23,4600.3 -634.39,4600.3 -373.8,4860.89 736.39,4860.89 748.69,4873.19 748.69,4902.23 J34.C8
GTP3TX_N: J9.5 J34.F8 | length 1846.1
  Top Layer w15: J9.5@-974.41,4587.4 -927.54,4587.4 -913.04,4601.9 -850.68,4601.9 -816.93,4635.66 -816.93,4842.52 -770.41,4889.04 -593.24,4889.04 -522.97,4959.32 550.52,4959.32 550.52,4940.29 J34.F8
GTP3TX_P: J9.6 J34.E8 | length 1880.9
  Top Layer w15: J9.6@-974.41,4637.4 -927.54,4637.4 -913.04,4622.9 -859.38,4622.9 -837.93,4644.35 -837.93,4851.22 -779.11,4910.04 -601.94,4910.04 -531.67,4980.32 559.22,4980.32 571.52,4968.01 571.52,4940.29 J34.E8
GTP4RX_N: J10.3 J34.D7 | length 1569.6
  Top Layer w15: J10.3 -604.7,4486 -594.52,4475.81 v1(-575.79,4475.81)
  Bottom Layer w15: v1(-575.79,4475.81) -571.48,4471.5 -402.08,4471.5 -90.11,4783.46 727.69,4783.46 727.69,4803.81 J34.D7
GTP4RX_P: J10.2 J34.C7 | length 1604.4
  Top Layer w15: J10.2 -604.7,4436 -594.52,4446.18 v1(-575.79,4446.18)
  Bottom Layer w15: v1(-575.79,4446.18) -571.48,4450.5 -393.38,4450.5 -81.41,4762.46 736.39,4762.46 748.69,4774.77 748.69,4803.81 J34.C7
GTP4TX_N: J10.5 J34.F7 | length 1400.6
  Top Layer w15: J10.5@-688.98,4587.4 -634.23,4587.4 -619.73,4601.9 -545.74,4601.9 -285.43,4862.2 550.52,4862.2 550.52,4841.86 J34.F7
GTP4TX_P: J10.6 J34.E7 | length 1435.4
  Top Layer w15: J10.6@-688.98,4637.4 -634.23,4637.4 -619.73,4622.9 -554.43,4622.9 -294.13,4883.2 559.22,4883.2 571.52,4870.9 571.52,4841.86 J34.E7
GTP5RX_N: J11.3 J34.D6 | length 2163.6
  Top Layer w15: J11.3 -927.54,3785.77 -917.35,3775.58 v1(-905.51,3775.58)
  Bottom Layer w15: v1(-905.51,3775.58) -901.2,3771.27 -854.71,3771.27 -821.2,3804.79 -821.2,3855.53 -754.24,3922.48 -652.93,3922.48 109.62,4685.04 727.69,4685.04 727.69,4705.38 J34.D6
GTP5RX_P: J11.2 J34.C6 | length 2198.4
  Top Layer w15: J11.2 -927.54,3735.77 -917.35,3745.96 v1(-905.51,3745.96)
  Bottom Layer w15: v1(-905.51,3745.96) -901.2,3750.27 -846.02,3750.27 -800.2,3796.09 -800.2,3846.83 -745.55,3901.48 -644.24,3901.48 118.32,4664.04 736.39,4664.04 748.69,4676.34 748.69,4705.38 J34.C6
GTP5TX_N: J11.5 J34.F6 | length 2203.6
  Top Layer w15: J11.5 -927.54,3885.77 -920.07,3893.24 -886.97,3893.24 -845.14,3935.07 -845.14,4088.13 -771.2,4162.07 -524.11,4162.07 -482.28,4203.9 -482.28,4517.72 -236.22,4763.78 540.68,4763.78 550.52,4753.94 550.52,4743.44 J34.F6
GTP5TX_P: J11.6 J34.E6 | length 2244.2
  Top Layer w15: J11.6 -927.54,3935.77 -906.01,3914.24 -895.67,3914.24 -866.14,3943.77 -866.14,4096.82 -779.9,4183.07 -532.81,4183.07 -503.28,4212.6 -503.28,4526.41 -244.92,4784.78 549.38,4784.78 571.52,4762.64 571.52,4743.44 J34.E6
GTP6RX_N: J12.3 J34.D5 | length 1833.7
  Top Layer w15: J12.3 -604.7,3785.77 -590.2,3771.27 -575.18,3771.27 v1(-570.87,3775.58)
  Bottom Layer w15: v1(-570.87,3775.58) -566.56,3771.27 -520.07,3771.27 -473.76,3817.58 -473.76,3906.34 206.52,4586.61 727.69,4586.61 727.69,4606.96 J34.D5
GTP6RX_P: J12.2 J34.C5 | length 1868.5
  Top Layer w15: J12.2 -604.7,3735.77 -590.2,3750.27 -575.18,3750.27 v1(-570.87,3745.96)
  Bottom Layer w15: v1(-570.87,3745.96) -566.56,3750.27 -511.37,3750.27 -452.76,3808.88 -452.76,3897.64 215.22,4565.61 736.39,4565.61 748.69,4577.92 748.69,4606.96 J34.C5
GTP6TX_N: J12.5 J34.F5 | length 1850.8
  Top Layer w15: J12.5@-679.13,3878.74 -624.39,3878.74 -609.89,3893.24 -535.72,3893.24 -413.39,4015.58 -413.39,4438.98 -187.01,4665.35 550.52,4665.35 550.52,4645.01 J34.F5
GTP6TX_P: J12.6 J34.E5 | length 1885.6
  Top Layer w15: J12.6@-679.13,3928.74 -624.39,3928.74 -609.89,3914.24 -544.42,3914.24 -434.39,4024.28 -434.39,4447.67 -195.71,4686.35 559.22,4686.35 571.52,4674.05 571.52,4645.01 J34.E5
GTP7RX_N: J13.3 J34.D4 | length 2555.7
  Top Layer w15: J13.3 -927.54,3085.55 -917.35,3075.36 v1(-905.51,3075.36)
  Bottom Layer w15: v1(-905.51,3075.36) -901.2,3071.05 -885.83,3071.05 -867.46,3089.42 -867.46,3453.58 -811.45,3509.59 -645.27,3509.59 333.33,4488.19 727.69,4488.19 727.69,4508.53 J34.D4
GTP7RX_P: J13.2 J34.C4 | length 2590.5
  Top Layer w15: J13.2 -927.54,3035.55 -917.35,3045.73 v1(-905.51,3045.73)
  Bottom Layer w15: v1(-905.51,3045.73) -901.2,3050.05 -877.13,3050.05 -846.46,3080.72 -846.46,3444.88 -802.75,3488.59 -636.57,3488.59 342.03,4467.19 736.39,4467.19 748.69,4479.49 748.69,4508.53 J34.C4
GTP7TX_N: J13.5 J34.F4 | length 2551.7
  Top Layer w15: J13.5 -927.54,3185.55 -913.04,3200.05 -896.81,3200.05 -795.93,3300.93 -795.93,3446.2 -767.72,3474.41 -650.75,3474.41 -334.65,3790.51 -334.65,4350.39 -118.11,4566.93 540.68,4566.93 550.52,4557.09 550.52,4546.59 J34.F4
GTP7TX_P: J13.6 J34.E4 | length 2586.5
  Top Layer w15: J13.6 -927.54,3235.55 -913.04,3221.05 -905.51,3221.05 -816.93,3309.63 -816.93,3454.9 -776.41,3495.41 -659.45,3495.41 -355.65,3799.21 -355.65,4359.09 -126.81,4587.93 549.38,4587.93 571.52,4565.79 571.52,4546.59 J34.E4
GTP8RX_N: J14.3 J34.D3 | length 2240.2
  Top Layer w15: J14.3 -604.7,3085.55 -594.52,3075.36 v1(-570.87,3075.36)
  Bottom Layer w15: v1(-570.87,3075.36) -566.56,3071.05 -551.18,3071.05 -540.19,3082.03 -540.19,3514.92 334.65,4389.76 727.69,4389.76 727.69,4410.11 J34.D3
GTP8RX_P: J14.2 J34.C3 | length 2275.1
  Top Layer w15: J14.2 -604.7,3035.55 -594.52,3045.73 v1(-570.87,3045.73)
  Bottom Layer w15: v1(-570.87,3045.73) -566.56,3050.05 -542.48,3050.05 -531.5,3061.03 -531.32,3061.03 -521.48,3070.87 -521.48,3071.05 -519.19,3073.33 -519.19,3506.23 343.34,4368.76 736.39,4368.76 748.69,4381.07 748.69,4410.11 J34.C3
GTP8TX_N: J14.5 J34.F3 | length 2193.7
  Top Layer w15: J14.5 -604.7,3185.55 -590.2,3200.05 -567.09,3200.05 -551.18,3215.95 -551.18,3474.24 -265.75,3759.67 -265.75,4192.91 9.84,4468.5 550.52,4468.5 550.52,4448.16 J34.F3
GTP8TX_P: J14.6 J34.E3 | length 2228.5
  Top Layer w15: J14.6 -604.7,3235.55 -590.2,3221.05 -575.79,3221.05 -572.18,3224.65 -572.18,3482.94 -286.75,3768.37 -286.75,4201.61 1.14,4489.5 559.22,4489.5 571.52,4477.2 571.52,4448.16 J34.E3
GTP9RX_N: J15.3 J34.D2 | length 3013
  Top Layer w15: J15.3 -927.54,2385.32 -917.35,2375.13 v1(-905.51,2375.13)
  Bottom Layer w15: v1(-905.51,2375.13) -901.2,2370.82 -885.83,2370.82 -788.72,2467.93 -788.72,2764.6 -758.04,2795.28 -659.67,2795.28 -464.39,2990.56 -464.39,3482.81 344.15,4291.34 727.69,4291.34 727.69,4311.68 J34.D2
GTP9RX_P: J15.2 J34.C2 | length 3047.8
  Top Layer w15: J15.2 -927.54,2335.32 -917.35,2345.51 v1(-905.51,2345.51)
  Bottom Layer w15: v1(-905.51,2345.51) -901.2,2349.82 -877.13,2349.82 -767.72,2459.23 -767.72,2755.91 -749.35,2774.28 -650.97,2774.28 -443.39,2981.86 -443.39,3474.11 352.85,4270.34 736.39,4270.34 748.69,4282.64 748.69,4311.68 J34.C2
GTP9TX_N: J15.5 J34.F2 | length 2946.1
  Top Layer w15: J15.5 -927.54,2485.32 -913.04,2499.82 -896.81,2499.82 -835.3,2561.33 -835.3,2717.85 -778.66,2774.49 -650.75,2774.49 -480.97,2944.28 -480.97,3436.53 -196.85,3720.64 -196.85,4094.49 78.74,4370.08 540.68,4370.08 550.52,4360.24 550.52,4349.74 J34.F2
GTP9TX_P: J15.6 J34.E2 | length 2980.9
  Top Layer w15: J15.6 -927.54,2535.32 -913.04,2520.82 -905.51,2520.82 -856.3,2570.03 -856.3,2726.55 -787.35,2795.49 -659.45,2795.49 -501.97,2952.97 -501.97,3445.22 -217.85,3729.34 -217.85,4103.19 70.04,4391.08 549.38,4391.08 571.52,4368.93 571.52,4349.74 J34.E2
GTP10RX_N: J16.3 J34.D1 | length 2710.4
  Top Layer w15: J16.3 -604.7,2385.32 -594.52,2375.13 v1(-575.79,2375.13)
  Bottom Layer w15: v1(-575.79,2375.13) -567.95,2375.13 -552.5,2390.59 -552.5,2793.96 -395.02,2951.44 -395.02,3443.57 355.65,4194.23 719.16,4194.23 727.69,4202.76 727.69,4213.26 J34.D1
GTP10RX_P: J16.2 J34.C1 | length 2748.7
  Top Layer w15: J16.2 -604.7,2335.32 -594.52,2345.51 v1(-575.79,2345.51)
  Bottom Layer w15: v1(-575.79,2345.51) -567.88,2345.51 -531.5,2381.89 -531.5,2785.26 -374.02,2942.74 -374.02,3434.87 364.34,4173.23 727.86,4173.23 748.69,4194.06 748.69,4213.26 J34.C1
GTP10TX_N: J16.5 J34.F1 | length 2622.2
  Top Layer w15: J16.5 -604.7,2485.32 -590.2,2499.82 -567.09,2499.82 -501.97,2564.94 -501.97,2736.22 -412.07,2826.12 -412.07,3406.83 -127.95,3690.94 -127.95,4005.91 137.8,4271.65 550.52,4271.65 550.52,4251.31 J34.F1
GTP10TX_P: J16.6 J34.E1 | length 2656.9
  Top Layer w15: J16.6 -604.7,2535.32 -590.2,2520.82 -575.79,2520.82 -522.97,2573.64 -522.97,2744.92 -433.07,2834.82 -433.07,3415.53 -148.95,3699.64 -148.95,4014.6 129.1,4292.65 559.22,4292.65 571.52,4280.35 571.52,4251.31 J34.E1
GTP11RX_N: J2.3 J32.D10 | length 3521.4
  Top Layer w15: J2.3 -927.54,1685.1 -917.35,1674.91 v1(-905.51,1674.91)
  Bottom Layer w15: v1(-905.51,1674.91) -901.2,1670.6 -866.14,1670.6 -847.77,1688.97 -847.77,1996.89 -735.52,2109.14 -628.4,2109.14 -572.18,2165.35 -572.18,2262.46 -335.96,2498.69 -335.96,3394.53 364,4094.49 727.69,4094.49 727.69,4114.83 J32.D10
GTP11RX_P: J2.2 J32.C10 | length 3556.2
  Top Layer w15: J2.2 -927.54,1635.1 -917.35,1645.28 v1(-905.51,1645.28)
  Bottom Layer w15: v1(-905.51,1645.28) -901.2,1649.6 -857.44,1649.6 -826.77,1680.27 -826.77,1988.19 -726.82,2088.14 -619.7,2088.14 -551.18,2156.66 -551.18,2253.77 -314.96,2489.99 -314.96,3385.83 372.7,4073.49 736.39,4073.49 748.69,4085.79 748.69,4114.83 J32.C10
GTP11TX_N: J2.5 J32.F10 | length 3330.1
  Top Layer w15: J2.5 -927.54,1785.1 -913.04,1799.6 -896.81,1799.6 -864.83,1831.58 -864.83,1988.19 -778.75,2074.27 -642.1,2074.27 -431.76,2284.61 -431.76,2678.48 -343.17,2767.06 -343.17,3378.61 -49.21,3672.57 -49.21,3838.58 281.22,4169.01 544.9,4169.01 550.52,4163.39 550.52,4152.89 J32.F10
GTP11TX_P: J2.6 J32.E10 | length 3364.9
  Top Layer w15: J2.6 -927.54,1835.1 -913.04,1820.6 -905.51,1820.6 -885.83,1840.28 -885.83,1996.89 -787.45,2095.27 -650.79,2095.27 -452.76,2293.31 -452.76,2687.18 -364.17,2775.76 -364.17,3387.31 -70.21,3681.27 -70.21,3847.28 272.52,4190.01 553.6,4190.01 571.52,4172.08 571.52,4152.89 J32.E10
GTP12RX_N: J1.3 J32.D9 | length 3244.5
  Top Layer w15: J1.3 -604.7,1685.1 -590.2,1670.6 -575.79,1670.6 -570.86,1675.52 v1(-570.87,1677.37)
  Bottom Layer w15: v1(-570.87,1677.37) -566.56,1673.06 -511.81,1673.06 -472.44,1712.43 -472.44,2214.74 -257.22,2429.96 -257.22,3374.84 365.32,3997.38 709.32,3997.38 727.69,4015.75 727.69,4016.41 J32.D9
GTP12RX_P: J1.2 J32.C9 | length 3277.3
  Top Layer w15: J1.2 -604.7,1635.1 -590.2,1649.6 -570.86,1649.6 v1(-570.87,1647.75)
  Bottom Layer w15: v1(-570.87,1647.75) -566.56,1652.06 -503.11,1652.06 -451.44,1703.73 -451.44,2206.04 -236.22,2421.26 -236.22,3366.14 374.02,3976.38 718.02,3976.38 748.69,4007.05 748.69,4016.41 J32.C9
GTP12TX_N: J1.5 J32.F9 | length 3053.3
  Top Layer w15: J1.5 -604.7,1785.1 -590.2,1799.6 -473.86,1799.6 -264.43,2009.02 -264.43,3367.63 9.84,3641.9 9.84,3740.16 344.49,4074.8 540.68,4074.8 550.52,4064.96 550.52,4054.46 J32.F9
GTP12TX_P: J1.6 J32.E9 | length 3088.1
  Top Layer w15: J1.6 -604.7,1835.1 -590.2,1820.6 -482.55,1820.6 -285.43,2017.72 -285.43,3376.33 -11.16,3650.6 -11.16,3748.86 335.79,4095.8 549.38,4095.8 571.52,4073.66 571.52,4054.46 J32.E9
GTP13RX_N: J4.3 J32.D8 | length 4077.4
  Top Layer w15: J4.3 -927.54,984.87 -917.35,974.68 v1(-905.51,974.68)
  Bottom Layer w15: v1(-905.51,974.68) -901.2,970.37 -866.14,970.37 -847.77,988.74 -847.77,1317.75 -767.89,1397.64 -551.18,1397.64 -375.33,1573.49 -375.33,2183.72 -188.15,2370.9 -188.15,3325.8 383.69,3897.64 727.69,3897.64 727.69,3917.98 J32.D8
GTP13RX_P: J4.2 J32.C8 | length 4112.2
  Top Layer w15: J4.2 -927.54,934.87 -917.35,945.06 v1(-905.51,945.06)
  Bottom Layer w15: v1(-905.51,945.06) -901.2,949.37 -857.44,949.37 -826.77,980.04 -826.77,1309.06 -759.19,1376.64 -542.48,1376.64 -354.33,1564.79 -354.33,2175.03 -167.15,2362.2 -167.15,3317.1 392.39,3876.64 736.39,3876.64 748.69,3888.94 748.69,3917.98 J32.C8
GTP13TX_N: J4.5 J32.F8 | length 3930
  Top Layer w15: J4.5 -927.54,1084.87 -913.04,1099.37 -877.13,1099.37 -795.93,1180.57 -795.93,1339.9 -759.19,1376.64 -424.37,1376.64 -177.17,1623.85 -177.17,3366.14 99.74,3643.05 99.74,3721.79 354.33,3976.38 550.52,3976.38 550.52,3956.04 J32.F8
GTP13TX_P: J4.6 J32.E8 | length 3964.8
  Top Layer w15: J4.6 -927.54,1134.87 -913.04,1120.37 -885.83,1120.37 -816.93,1189.27 -816.93,1348.6 -767.89,1397.64 -433.07,1397.64 -198.17,1632.54 -198.17,3374.84 78.74,3651.75 78.74,3730.49 345.63,3997.38 559.22,3997.38 571.52,3985.08 571.52,3956.04 J32.E8
GTP14RX_N: J3.3 J32.D7 | length 3711.4
  Top Layer w15: J3.3 -604.7,984.87 -590.2,970.37 -575.18,970.37 v1(-570.87,974.68)
  Bottom Layer w15: v1(-570.87,974.68) -566.56,970.37 -551.18,970.37 -531.5,990.06 -531.5,1269.86 -236.22,1565.13 -236.22,2175.37 -119.43,2292.16 -119.43,3272.65 407.14,3799.21 727.69,3799.21 727.69,3819.56 J32.D7
GTP14RX_P: J3.2 J32.C7 | length 3746.2
  Top Layer w15: J3.2 -604.7,934.87 -590.2,949.37 -575.18,949.37 v1(-570.87,945.06)
  Bottom Layer w15: v1(-570.87,945.06) -566.56,949.37 -542.48,949.37 -510.5,981.36 -510.5,1261.16 -215.22,1556.43 -215.22,2166.67 -98.43,2283.46 -98.43,3263.95 415.84,3778.21 736.39,3778.21 748.69,3790.51 748.69,3819.56 J32.C7
GTP14TX_N: J3.5 J32.F7 | length 3596.3
  Top Layer w15: J3.5 -604.7,1084.87 -590.2,1099.37 -386.68,1099.37 -87.27,1398.78 -87.27,3347.6 177.17,3612.03 177.17,3691.12 364,3877.95 540.68,3877.95 550.52,3868.11 550.52,3857.61 J32.F7
GTP14TX_P: J3.6 J32.E7 | length 3631.1
  Top Layer w15: J3.6 -604.7,1134.87 -590.2,1120.37 -395.38,1120.37 -108.27,1407.48 -108.27,3356.3 156.17,3620.73 156.17,3699.81 355.3,3898.95 549.38,3898.95 571.52,3876.81 571.52,3857.61 J32.E7
GTP15RX_N: J6.3 J32.D6 | length 4432.2
  Top Layer w15: J6.3 -927.54,284.65 -913.04,270.15 -890.14,270.15 v1(-885.83,274.46)
  Bottom Layer w15: v1(-885.83,274.46) -881.52,270.15 -866.14,270.15 -787.4,348.89 -787.4,610.41 -433.07,964.74 -433.07,1210.8 -157.48,1486.39 -157.48,2166.84 -30.84,2293.48 -30.84,3233 374.02,3637.86 374.02,3667.66 408.45,3702.1 709.32,3702.1 727.69,3720.47 727.69,3721.13 J32.D6
GTP15RX_P: J6.2 J32.C6 | length 4467
  Top Layer w15: J6.2 -927.54,234.65 -913.04,249.15 -890.14,249.15 v1(-885.83,244.83)
  Bottom Layer w15: v1(-885.83,244.83) -881.52,249.15 -857.44,249.15 -766.4,340.19 -766.4,601.71 -412.07,956.04 -412.07,1202.1 -136.48,1477.69 -136.48,2158.14 -9.84,2284.78 -9.84,3224.3 395.02,3629.16 395.02,3658.97 417.15,3681.1 718.02,3681.1 748.69,3711.77 748.69,3721.13 J32.C6
GTP15TX_N: J6.5 J32.F6 | length 4536.3
  Top Layer w15: J6.5 -927.54,384.65 -913.04,399.15 -877.13,399.15 -766.4,509.87 -766.4,620.08 -727.03,659.45 -216.36,659.45 -9.84,865.97 -9.84,3336.61 237.54,3583.99 237.54,3662.73 354.33,3779.53 550.52,3779.53 550.52,3759.19 J32.F6
GTP15TX_P: J6.6 J32.E6 | length 4571.1
  Top Layer w15: J6.6 -927.54,434.65 -913.04,420.15 -885.83,420.15 -787.4,518.57 -787.4,628.78 -735.73,680.45 -225.06,680.45 -30.84,874.67 -30.84,3345.31 216.54,3592.69 216.54,3671.43 345.63,3800.53 559.22,3800.53 571.52,3788.23 571.52,3759.19 J32.E6
GTP16RX_N: J5.3 J32.D5 | length 4218.1
  Top Layer w15: J5.3 -604.7,284.65 -590.2,270.15 -555.49,270.15 v1(-551.18,274.46)
  Bottom Layer w15: v1(-551.18,274.46) -546.87,270.15 -531.5,270.15 -393.7,407.94 -393.7,836.79 -295.28,935.21 -295.28,1170.12 -51.84,1413.55 -51.84,2143.21 38.06,2233.11 38.06,3217.36 424.37,3603.68 569.55,3603.68 570.87,3602.36 727.69,3602.36 727.69,3622.7 J32.D5
GTP16RX_P: J5.2 J32.C5 | length 4252.9
  Top Layer w15: J5.2 -604.7,234.65 -590.2,249.15 -555.49,249.15 v1(-551.18,244.83)
  Bottom Layer w15: v1(-551.18,244.83) -546.87,249.15 -522.8,249.15 -372.7,399.24 -372.7,828.09 -274.28,926.51 -274.28,1161.42 -30.84,1404.85 -30.84,2134.51 59.06,2224.41 59.06,3208.66 433.07,3582.68 560.85,3582.68 562.17,3581.36 736.39,3581.36 748.69,3593.66 748.69,3622.7 J32.C5
GTP16TX_N: J5.5 J32.F5 | length 4176.5
  Top Layer w15: J5.5 -604.7,384.65 -590.2,399.15 -289.66,399.15 70.21,759.02 70.21,3327.92 296.59,3554.29 296.59,3637.97 339.73,3681.1 550.52,3681.1 550.52,3660.76 J32.F5
GTP16TX_P: J5.6 J32.E5 | length 4211.3
  Top Layer w15: J5.6 -604.7,434.65 -590.2,420.15 -298.36,420.15 49.21,767.72 49.21,3336.61 275.59,3562.99 275.59,3646.67 331.03,3702.1 559.22,3702.1 571.52,3689.8 571.52,3660.76 J32.E5
IO0: J34.B10
IO1: J34.A10
IO2: J34.B9
IO3: J34.A9
IO4: J34.B8
IO5: J34.A8
IO6: J34.B7
IO7: J34.A7
NetJ32_e2: J32.E2 J32.F1 | length 122.9
  Top Layer w15: J32.F1 531.5,3277.56 590.55,3336.61 J32.E2
P3V3MP: C44.2 C45.2 J32.C2 OSC1.1 OSC1.6 OSC2.2 OSC2.6 | length 499.3
  Top Layer w10: OSC2.2 v1(-259.84,5334.65) ; v1(-157.48,5543.31) -157.48,5438.58 OSC2.6 ; OSC1.1 -9.25,5434.65 35.43,5479.33 v1(35.43,5539.37) ; C45.2 59.06,5511.81 106.3,5464.57 111.81,5464.57 OSC1.6 88.98,5434.65 v1(86.61,5437.01)
P12V: J32.A1 J32.A2 J32.B1 J32.B2
pads on no net: FTG13.FTG2 FTG14.1 FTG15.1 FTG16.1 J1.MECH1 J1.MECH2 J3.MECH1 J3.MECH2 J5.MECH1 J5.MECH2 J7.MECH1 J7.MECH2 J10.MECH1 J10.MECH2 J12.MECH1 J12.MECH2 J14.MECH1 J14.MECH2 J16.MECH1 J16.MECH2 J32.A3 J32.A4 J32.A5 J32.A6 J32.A7 J32.A8 J32.A9 J32.A10 J32.B3 J32.B4 J32.B5 J32.B6 J32.B7 J32.B8 J32.B9 J32.B10 J32.C3 J32.C4 J32.D1 J32.D2 J32.D3 J32.D4 J32.E1 J32.E3 J32.E4 J32.F2 J32.F3 J32.F4 J34.A2 J34.A3 J34.A4 J34.A6 J34.B2 J34.B3 J34.B4 J34.B6 OSC1.2 OSC2.1

## Polygon pours and split planes (outlines as drawn)
GND on MidPlane_2 (split plane): 79.8,5519.65 80.19,5515.73 81.33,5511.96 83.19,5508.48 85.69,5505.44 88.73,5502.94 92.21,5501.08 95.98,5499.94 99.9,5499.55 985.3,5499.55 985.3,3208.01 99.9,3208.01 95.98,3207.63 92.21,3206.48 88.73,3204.63 85.69,3202.13 83.19,3199.08 81.33,3195.61 80.19,3191.84 79.8,3187.92 79.8,-142.39 -1142.84,-142.39 -1142.84,5666.95 79.8,5666.95
P3V3MP on MidPlane_1 (split plane): 79.8,5519.65 80.19,5515.73 81.33,5511.96 83.19,5508.48 85.69,5505.44 88.73,5502.94 92.21,5501.08 95.98,5499.94 99.9,5499.55 985.3,5499.55 985.3,3208.01 722.68,3208.01 722.68,3377.71 740.4,3395.43 818.9,3395.43 821.51,3395.77 823.94,3396.78 826.03,3398.38 896.9,3469.25 898.5,3471.33 899.51,3473.77 899.85,3476.38 899.85,4137.8 899.51,4140.41 898.5,4142.84 896.9,4144.93 848.67,4193.15 848.67,5134.67 848.33,5137.28 847.61,5139 847.32,5139.71 845.71,5141.8 775.66,5211.86 773.57,5213.46 771.14,5214.47 768.53,5214.81 -344.25,5214.81 -371.8,5242.37 -371.8,5666.95 79.8,5666.95
GND on MidPlane_1 (split plane): -391.98,5238.19 -391.63,5235.58 -390.62,5233.15 -389.02,5231.06 -355.56,5197.59 -353.47,5195.99 -351.04,5194.98 -348.42,5194.64 764.35,5194.64 828.5,5130.49 828.5,4188.98 828.84,4186.37 829.85,4183.93 831.45,4181.84 879.68,4133.62 879.68,3480.56 814.72,3415.6 736.22,3415.6 733.61,3415.25 731.18,3414.25 729.09,3412.64 705.47,3389.02 703.86,3386.93 702.86,3384.5 702.51,3381.89 702.51,3208.01 99.9,3208.01 95.98,3207.63 92.21,3206.48 88.73,3204.63 85.69,3202.13 83.19,3199.08 81.33,3195.61 80.19,3191.84 79.8,3187.92 79.8,-142.39 -1142.84,-142.39 -1142.84,5666.95 -391.98,5666.95

## Other copper
MidPlane_1 (plane layer: these items are gaps in the copper):
  lines w20: -377.95,5692.91 -381.89,5688.98 -381.89,5238.19 -348.42,5204.72 768.53,5204.72 838.58,5134.67 838.58,4188.98 889.76,4137.8 889.76,3476.38 818.9,3405.51 736.22,3405.51 712.6,3381.89 712.6,3181.1

## Silkscreen, mask and mechanical layers (free items; w line width, h text height)
Top Overlay:
  drawing of 1216 lines, arcs and shapes, not listed
  text "PCB RTM SATA rev1" at 27.56,3551.18 h59.06 r90
Bottom Overlay:
  drawing of 1216 lines, arcs and shapes, not listed
  text "PCB RTM SATA rev1" at 7.87,4236.22 h59.06 r90
Outline:
  lines w3: -89.37,5685.53 98.38,5685.53 ; 98.38,3189.43 98.38,-160.97 -1161.42,-160.97 -1161.42,5685.53 98.38,5685.53 ; 98.38,3189.43 1003.88,3189.43 ; 98.38,3189.43 1003.88,3189.43 ; 98.38,5518.13 1003.88,5518.13 ; 98.38,5518.13 98.38,5685.53 ; 98.38,5518.13 1003.88,5518.13 ; 98.38,5518.13 98.38,5685.53 ; 1003.88,3189.43 1003.88,5518.13 ; 1003.88,3189.43 1003.88,5518.13
Dimensions:
  drawing of 2050 lines, arcs and shapes, not listed

## Text inside footprints (layer, text, board x,y; h text height)
J32: Drill Drawing "PRESS-FIT TECHNOLOGY" at 425.2,3389.76 h39.37 r90; Drill Drawing "diam. 0.6mm +0.06 -0" at 1064.96,3372.05 h39.37 r90; Mechanical 8 "PCB Edge" at 1057.68,3570.87 h39.37 r90; Top Overlay "A1" at 1061.02,3248.03 h43.31 r90; Top Overlay "A10" at 1061.02,4055.12 h43.31 r90; Mechanical 14 "A1" at 1061.02,3248.03 h43.31 r90; Mechanical 14 "A10" at 1061.02,4055.12 h43.31 r90
J33: Mechanical 8 "PCB Edge" at 1062.98,5246.51 h39.37 r90
J34: Drill Drawing "PRESS-FIT TECHNOLOGY" at 425.2,4374.02 h39.37 r90; Drill Drawing "diam. 0.6mm +0.06 -0" at 1064.96,4356.3 h39.37 r90; Mechanical 8 "PCB Edge" at 1057.68,4555.12 h39.37 r90; Top Overlay "A1" at 1061.02,4232.28 h43.31 r90; Top Overlay "A10" at 1061.02,5039.37 h43.31 r90; Mechanical 14 "A1" at 1061.02,4232.28 h43.31 r90; Mechanical 14 "A10" at 1061.02,5039.37 h43.31 r90